# Altium PCB PCB1.PcbDoc (part 1 of 2)
Units mil, origin at the board's own origin, x right, y up, seen from the top; angles counter-clockwise.
Board outline 4130.42 x 3475.43 mil, 4 copper layers (Top Layer, Int1 (GND), Int2 (PWR), Bottom Layer), stack 53.912 mil thick; 60 components, 38 nets, 205 pads, 89 vias.
Unrouted connection lines stored in the file: 39.
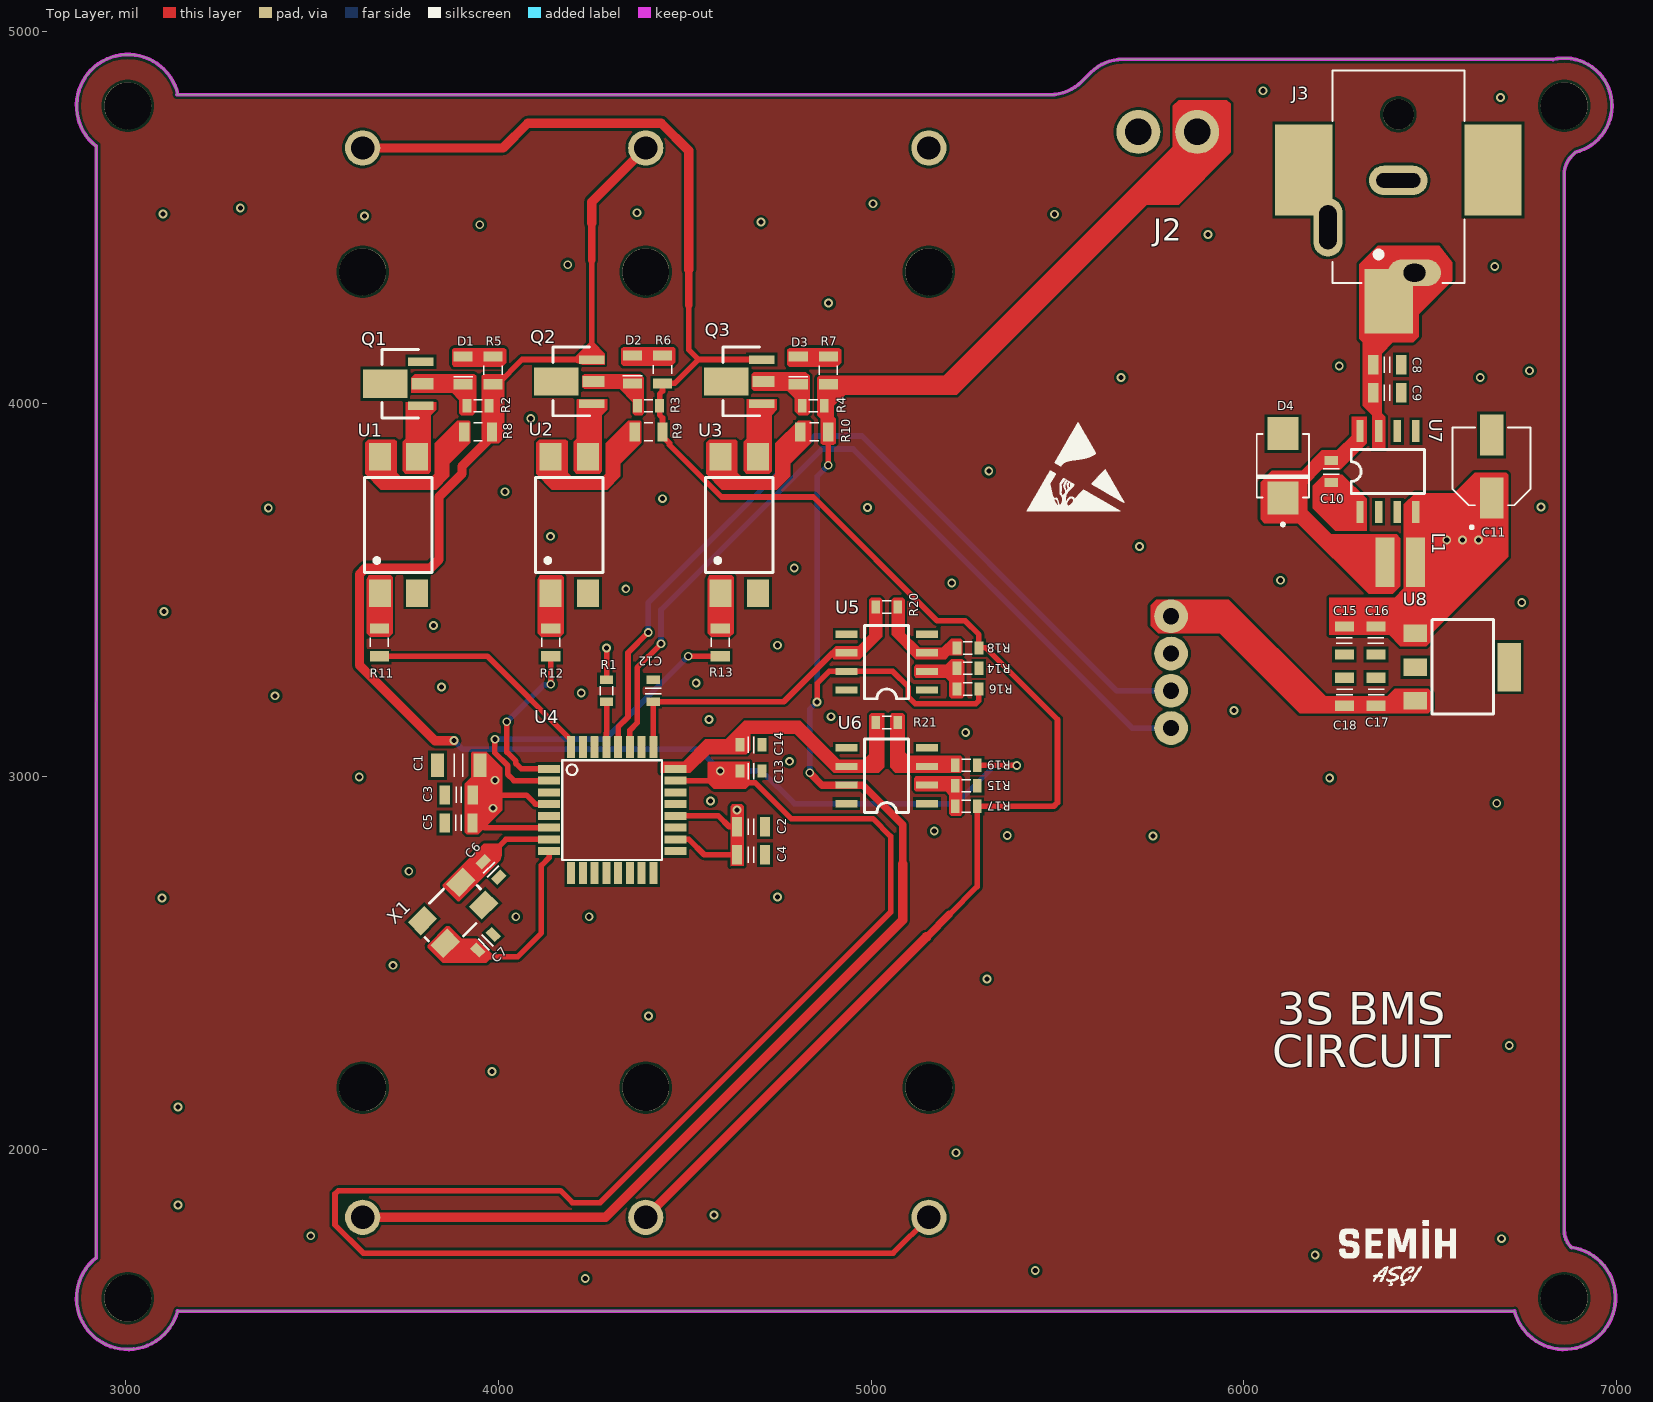
[diagram p0: Top Layer view]
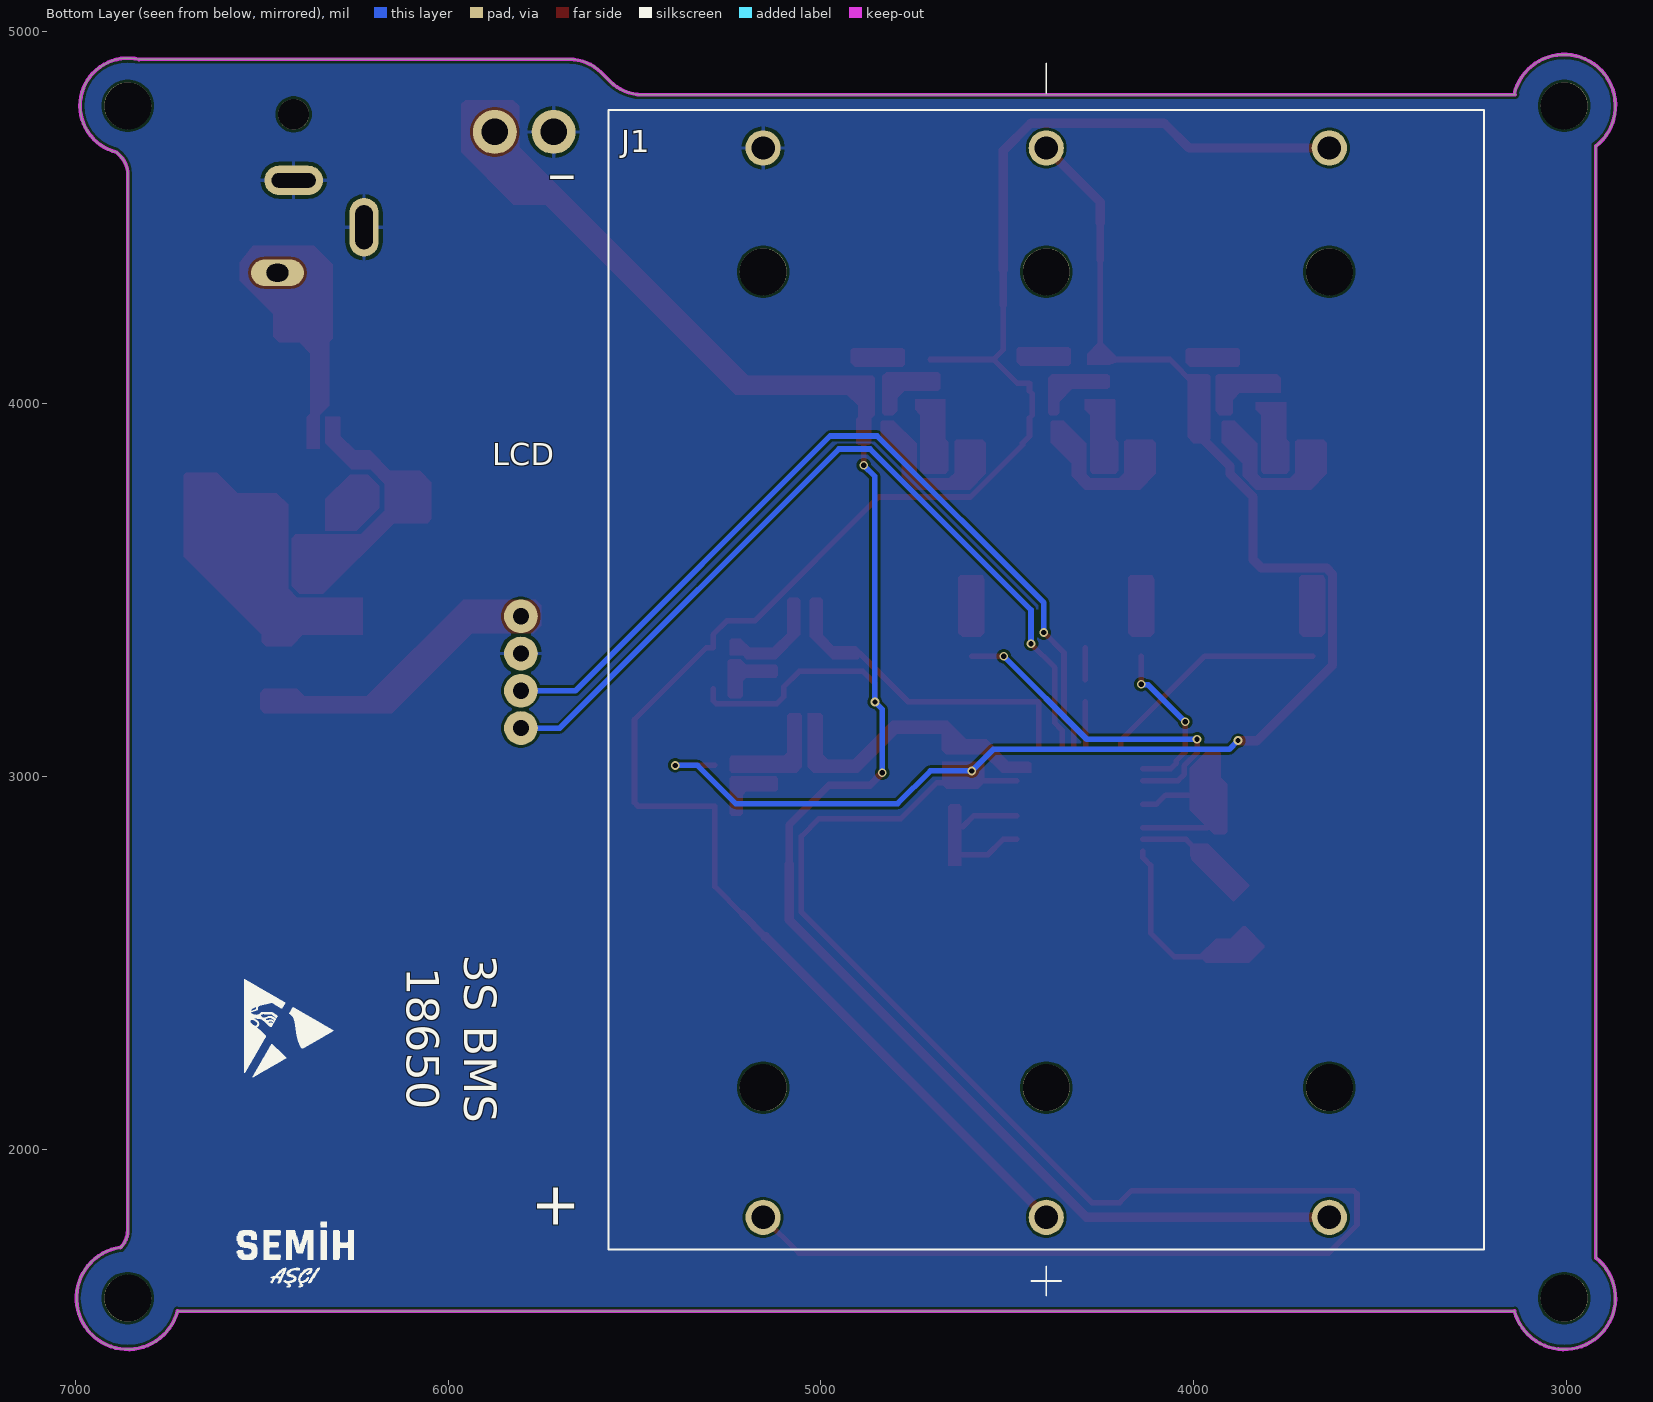
[diagram p1: Bottom Layer view, seen from below]
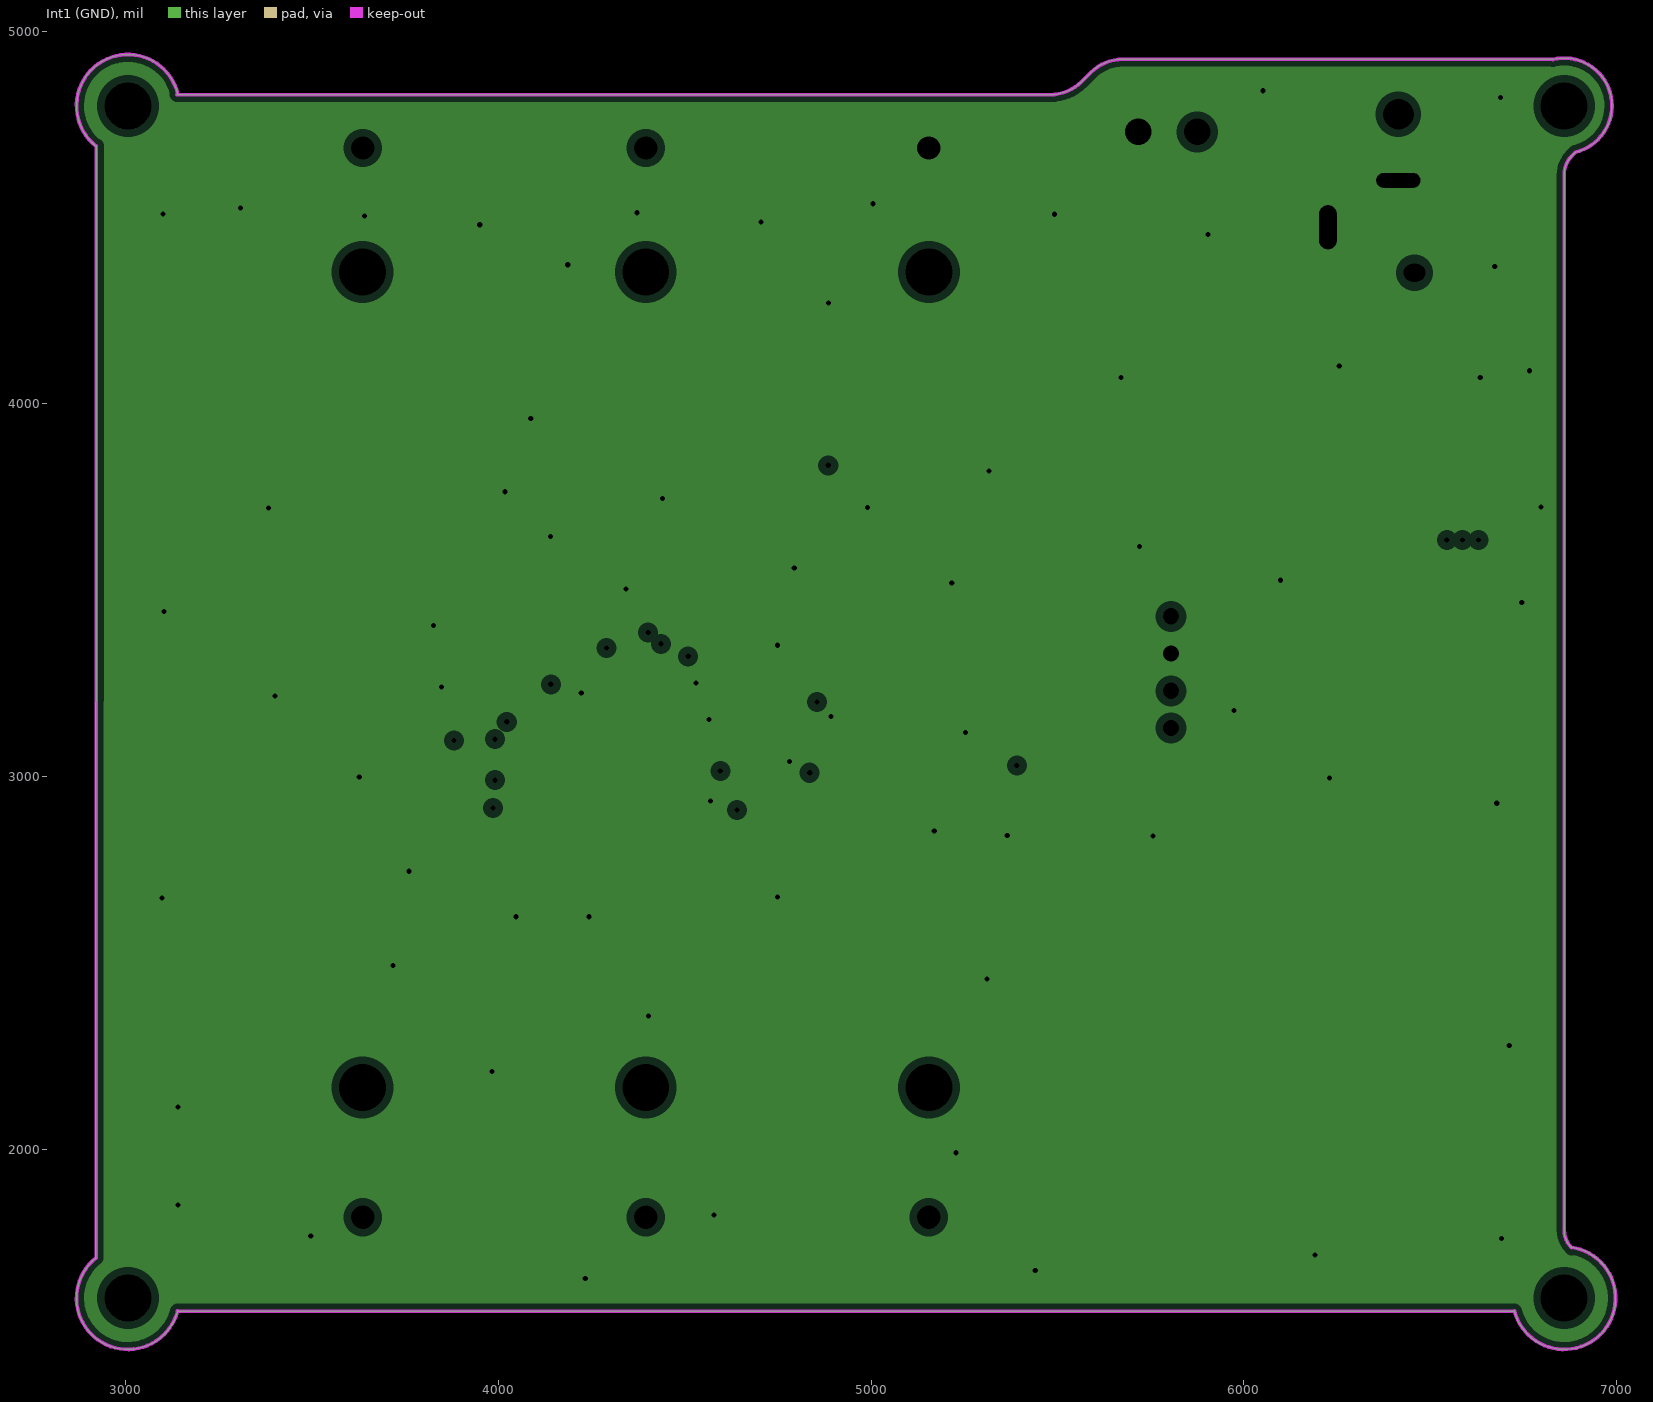
[diagram p2: Int1 (GND), clearances drawn from the general rule]
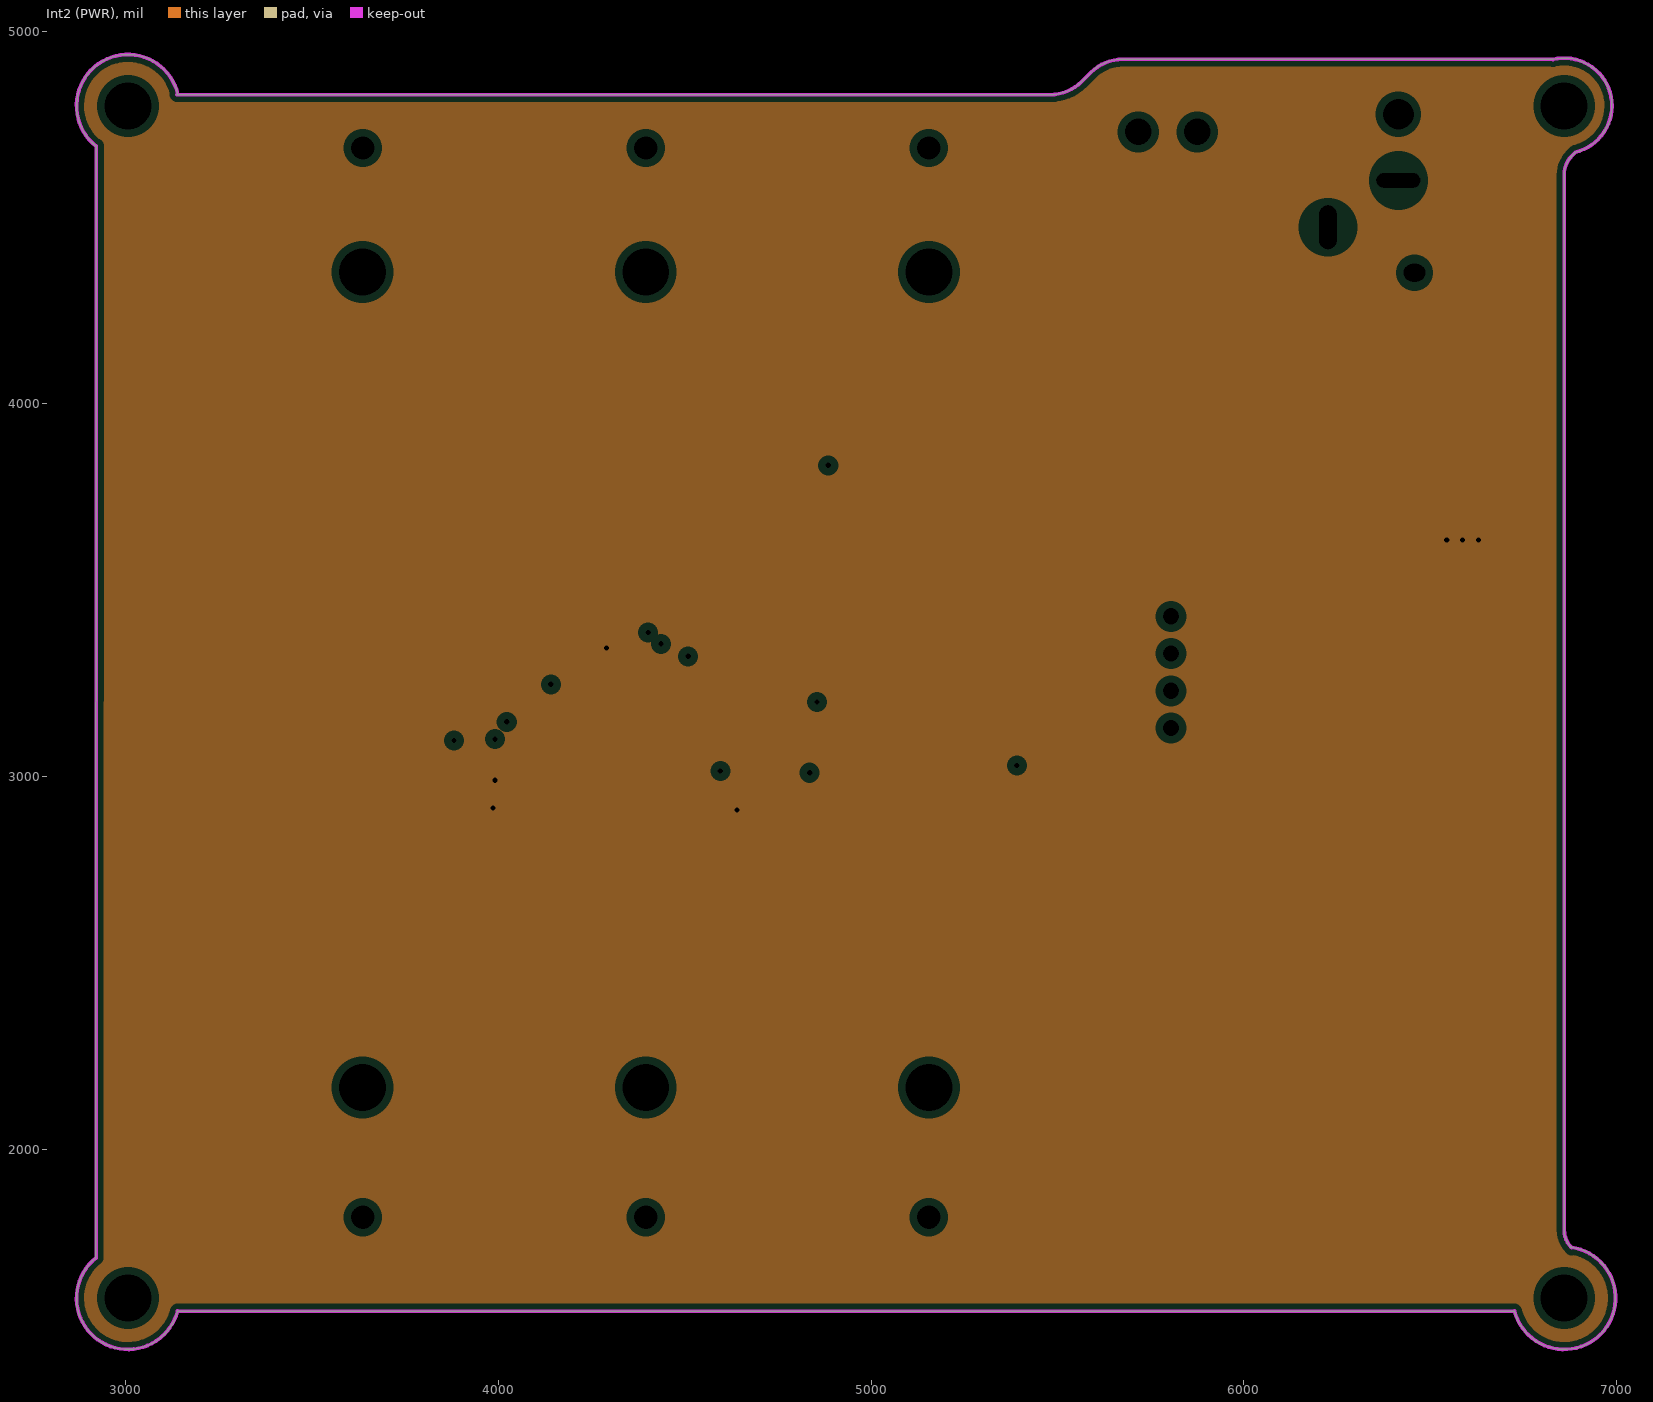
[diagram p3: Int2 (PWR), clearances drawn from the general rule]
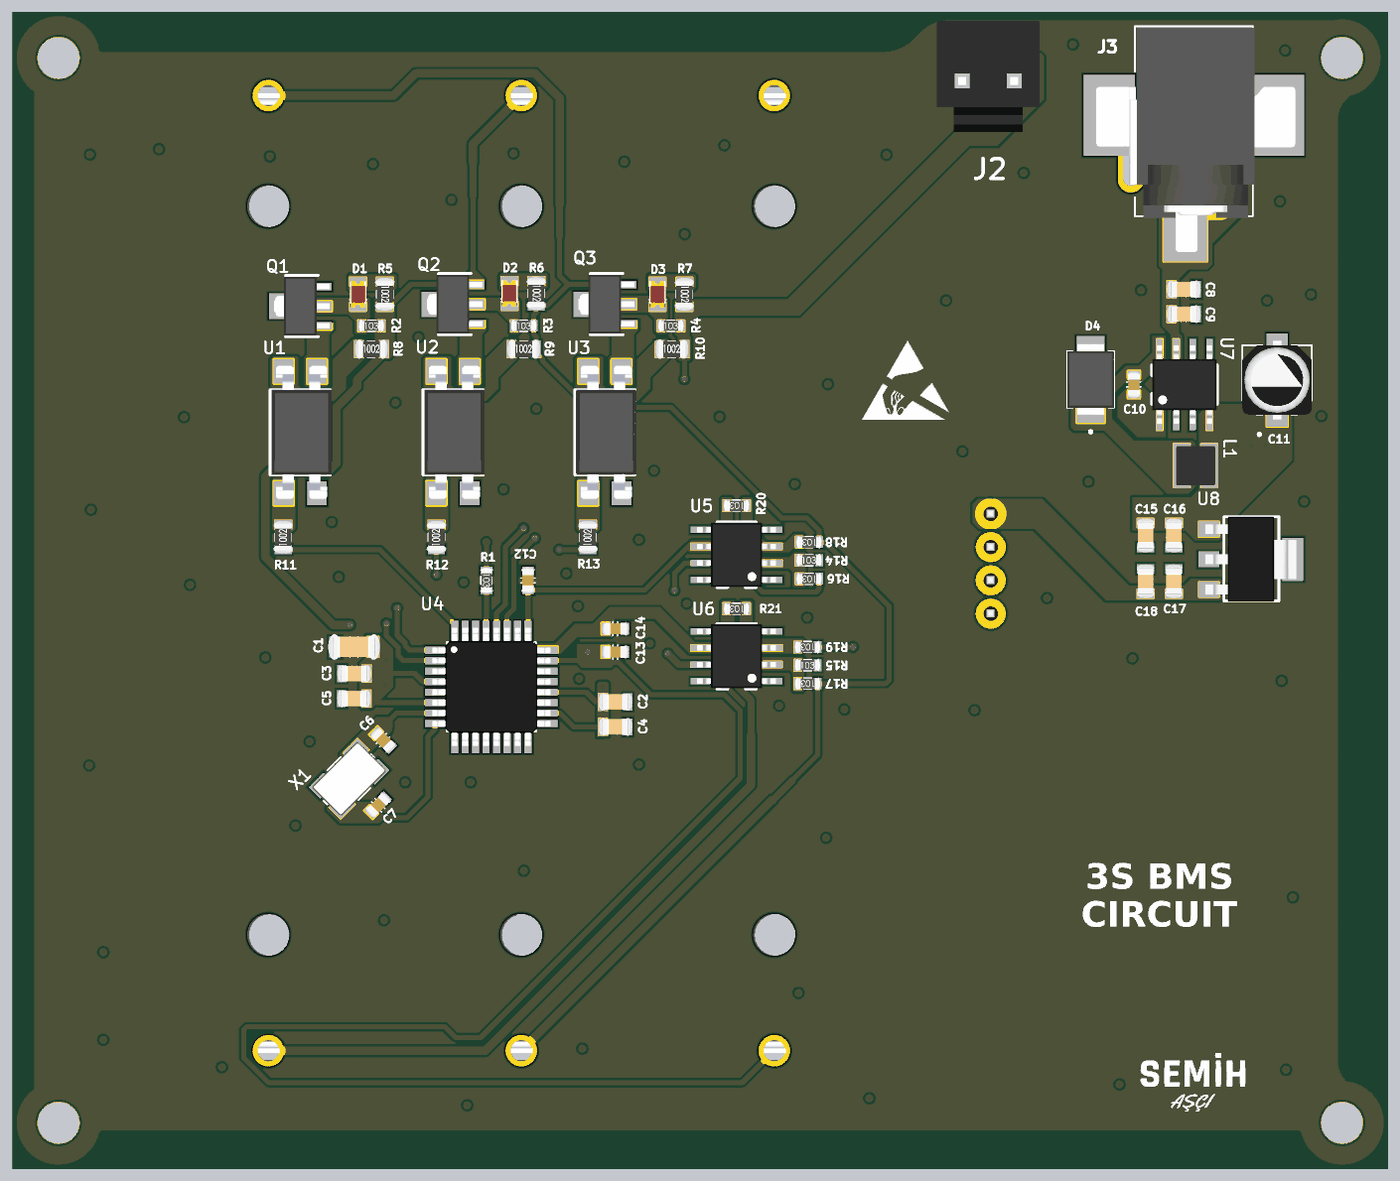
[diagram p4: 3D render of the assembled board from above, using the file's embedded part models]

## Layer stack, top to bottom
Top Solder: solder mask 1, SM-001, Dk 4
Top Layer: signal copper 1.378
Dielectric 1: prepreg 5.1, PP-017, Dk 4.3
Dielectric 2: prepreg 5.1, PP-017, Dk 4.3
Int1 (GND): plane copper 1.378, net GND
Dielectric 3: core 28, Core-039, Dk 4.8
Int2 (PWR): plane copper 1.378, net +5VDC
Dielectric 4: prepreg 5.1, PP-017, Dk 4.3
Dielectric 5: prepreg 5.1, PP-017, Dk 4.3
Bottom Layer: signal copper 1.378
Bottom Solder: solder mask 1, SM-001, Dk 4

## Board outline
2919.33,1707.93 ccw(c3005,1600) 3138.39,1565.42 3140,1565 6725,1565 6726.61,1565.42 ccw(c6860,1600) 6880.19,1736.31 6880,1735 cw(c6928.28,1783.28) 6860,1783.28 6860,1785 6860,4615 cw(c6932.42,4615) 6881.21,4666.21 6890,4675 6889.91,4675.38 ccw(c6860,4800) 6830.09,4924.62 6830,4925 5675,4925 ccw(c5675,4804.29) 5589.64,4889.64 5565.36,4865.36 cw(c5480,4950.71) 5480,4830 3136.82,4830 3139.36,4830.58 ccw(c3005,4800) 2919.62,4691.85 2920.43,4692.88

## Design rules (kind name [scope] priority, off if disabled: settings)
Clearance [All] p1: gap=7 ignorepadtopadclearanceinfootprint=FALSE except(0: Arc-Hole Track-Hole SMDPad-Hole THPad-Hole Via-Hole Fill-Hole Poly-Hole Region-Hole Text-Hole)
DiffPairsRouting [All] p1: maxlimit=10 minlimit=10 mostfreqgap=10 toplayer_minwidth=10 toplayer_maxwidth=15 toplayer_prefwidth=15 bottomlayer_minwidth=10 bottomlayer_maxwidth=15 bottomlayer_prefwidth=15 maxuncoupledlength=500
PlaneClearance [All] p1: clearance=20
PlaneConnect [All] p1: planeconnectstyle=Relief reliefexpansion=20 reliefentries=4 reliefconductorwidth=10 reliefairgap=10
PolygonConnect [All] p1: connectstyle=Relief reliefconductorwidth=10 reliefentries=4 polygonreliefangle="90 Angle" airgapwidth=10
RoutingCorners [All] p1: cornerstyle=45-Degree minsetback=80 maxsetback=80
RoutingVias [All] p1: holewidth=11.81 width=19.68 viastyle="Through Hole" minholewidth=9.84 minwidth=15.75 maxholewidth=19.68 maxwidth=39.37
SMDEntry [All] p1: side=TRUE corner=TRUE anyangle=FALSE
SMDToCorner [All] p1: distance=70000
SMDToPlane [All] p1: distance=70000
SolderMaskExpansion [All] p1: expansion=4 istentingtop=FALSE
Width [All] p1: maxlimit=75 minlimit=5 preferedwidth=15 minimp=50.000000 maximp=50.000000 favimp=50.000000
26 further rules are at their usual default settings.

## Components (designator, comment, footprint, x,y, rotation, side; value= is the part's Value field where it differs from the comment)
C1 "C1206C225K5RACAUTO" CAP_1206 3892.91,3030 r0 top
C2 "C0805C104K5RAC7800" CAP_0805 4677.4,2865 r180 top
C3 "C0805C104K5RAC7800" CAP_0805 3892.91,2950 r0 top
C4 "C0805C104K5RAC7800" CAP_0805 4677.4,2790 r180 top
C5 "C0805C104K5RAC7800" CAP_0805 3892.6,2875 r0 top
C6 "06035A220JAT2A" CAP_0603 3980,2750 r135 top
C7 "06035A220JAT2A" CAP_0603 3965,2555 r225 top
C8 "C0805C105M5RACTU" CAP_0805 6385,4105 r180 top
C9 "C0805C104K5RAC7800" CAP_0805 6385,4030 r180 top
C10 "0603B103K160CT" CAP_0603 6235,3818.43 r90 top
C11 "EEV686M035A9HAA" CAP_ELEC_EEE-HA0J101WR 6665,3832.17 r90 top
C12 "CL10B102KB8NNNC" CAP_0603 4415,3230 r270 top
C13 "CL10B102KB8NNNC" CAP_0603 4677.4,3015 r180 top
C14 "CL10B102KB8NNNC" CAP_0603 4677.4,3085 r180 top
C15 "C0805C105M5RACTU" CAP_0805 6270,3365 r90 top
C16 "C0805C104K5RAC7800" CAP_0805 6355,3365 r90 top
C17 "CL21A475KAQNNNE" CAP_0805 6355,3227.4 r270 top
C18 "C0805C105M5RACTU" CAP_0805 6270,3227.4 r270 top
D1 "LH R974-LP-1-0-20-R18" LED_RED_0805 3905,4090 r90 top
D2 "LH R974-LP-1-0-20-R18" LED_RED_0805 4359.61,4092.4 r90 top
D3 "LH R974-LP-1-0-20-R18" LED_RED_0805 4804.61,4090 r90 top
D4 "1SMB5919BT3G" SMB 6105,3833.94 r90 top
J1 "BK-18650-PC6" 18650x3 4395,3259.68 r90 bottom
J2 "B2P-VH-BK" 2x1_HEADER 5875,4730 r180 top
J3 "PJ-037AH-SMT-TR" POWER_JACK 6389.41,4275.2 r270 top
L1 "78438335470" IND_1212 6420,3575 r0 top
LCD "SSD1306" SSD1306_0.96inch 5805,3430 r270 bottom
Q1 "2SCR554P5T100" TO-243AA 3736.18,4054.06 r90 top
Q2 "2SCR554P5T100" TO-243AA 4195.12,4060 r90 top
Q3 "2SCR554P5T100" TO-243AA 4651.18,4060 r90 top
R1 "RC0603FR-0710KL" RES_0603 4290,3230 r270 top
R2 "RCP0603W50R0GEB" RES_0603 3945,3995 r0 top
R3 "RCP0603W50R0GEB" RES_0603 4402.6,3995 r0 top
R4 "RCP0603W50R0GEB" RES_0603 4844.53,3995 r0 top
R5 "RES 220 OHM 0805" RES_0805 3985,4090 r270 top
R6 "RES 220 OHM 0805" RES_0805 4440,4092.4 r270 top
R7 "RES 220 OHM 0805" RES_0805 4885,4090 r270 top
R8 "RC0805FR-071KL" RES_0805 3945,3925 r0 top
R9 "RC0805FR-071KL" RES_0805 4402.6,3925 r0 top
R10 "RC0805FR-071KL" RES_0805 4847.4,3925 r0 top
R11 "RES 220 OHM 0805" RES_0805 3680,3360 r90 top
R12 "RES 220 OHM 0805" RES_0805 4140,3360 r90 top
R13 "RES 220 OHM 0805" RES_0805 4595,3360 r90 top
R14 "RC0603FR-0710KL" RES_0603 5259.53,3290.32 r0 top
R15 "RC0603FR-0710KL" RES_0603 5255,2975 r0 top
R16 "RC0603FR-0710KL" RES_0603 5259.53,3235 r180 top
R17 "RC0603FR-0710KL" RES_0603 5255,2920 r180 top
R18 "RC0603FR-0710KL" RES_0603 5259.53,3345 r180 top
R19 "RC0603FR-0710KL" RES_0603 5255,3030 r180 top
R20 "RC0603FR-0710KL" RES_0603 5041.57,3455 r180 top
R21 "RC0603FR-0710KL" RES_0603 5041.57,3145 r180 top
U1 "BPC-817S ( C BIN )" "4-SMD, Gull Wing" 3735,3675 r90 top
U2 "BPC-817S ( C BIN )" "4-SMD, Gull Wing" 4193.94,3675 r90 top
U3 "BPC-817S ( C BIN )" "4-SMD, Gull Wing" 4650,3675 r90 top
U4 "ATMEGA88PA-AU" 32TQFP 4305,2910 r0 top
U5 "UA741CD" SOIC8 5040,3305 r90 top
U6 "UA741CD" SOIC8 5040,3000 r90 top
U7 "LM2675MX-12/NOPB" SOIC8 6385,3820 r0 top
U8 "AP7361-33E-13" SOT223 6585,3295 r270 top
X1 "ECS-160-20-30B-TR" ECS 3877.04,2632.73 r45 top

## Footprints (in the part's own frame and the unit in brackets; to place one, negate y for a bottom-side part, rotate by r counter-clockwise, add the part's x,y. Pads: shape width x height; smd on the part's side, far side on the other; paste and mask are expansions set on the pad)
2x1_HEADER [mm]
  round 3 hole 1.8 mask+0.05: 1(0,0) 2(4.01,0)
  body extent -1.95,-4.61 5.91,3.89, height 10.9
"4-SMD, Gull Wing" [mm]
  rect 1.85x1.5 smd: 1(-4.65,1.37) 2(-4.65,-1.17) 3(4.65,-1.17) 4(4.65,1.37)
  silkscreen extent -3.25,-2.2 3.25,2.4, body extent -5.08,-2.29 5.08,2.29, height 3.75
32TQFP [mm]
  rect 1.5x0.55 smd: 1(-4.3,2.8) 2(-4.3,2) 3(-4.3,1.2) 4(-4.3,0.4) 5(-4.3,-0.4) 6(-4.3,-1.2) 7(-4.3,-2) 8(-4.3,-2.8) 17(4.3,-2.8) 18(4.3,-2) 19(4.3,-1.2) 20(4.3,-0.4) 21(4.3,0.4) 22(4.3,1.2) 23(4.3,2) 24(4.3,2.8)
  rect 0.55x1.5 smd: 9(-2.8,-4.3) 10(-2,-4.3) 11(-1.2,-4.3) 12(-0.4,-4.3) 13(0.4,-4.3) 14(1.2,-4.3) 15(2,-4.3) 16(2.8,-4.3) 25(2.8,4.3) 26(2,4.3) 27(1.2,4.3) 28(0.4,4.3) 29(-0.4,4.3) 30(-1.2,4.3) 31(-2,4.3) 32(-2.8,4.3)
  silkscreen extent -3.4,-3.4 3.4,3.4, body extent -4.51,-4.51 4.51,4.51, height 1
18650x3 [mm]
  round 2.4 hole 1.6: 1+(-36.65,19.3) 1-(36.25,19.3) 2+(-36.65,0) 2-(36.25,0) 3+(-36.65,-19.3) 3-(36.25,-19.3)
  round 3.2 hole 3.2 unplated: ""(-27.805,-19.3) ""(-27.805,0) ""(-27.805,19.3) ""(27.805,-19.3) ""(27.805,0) ""(27.805,19.3)
  silkscreen extent -42,-29.84 42,29.84, body extent -38.86,-29.74 38.84,29.95, height 21.74
CAP_0603 [mm]
  rect 0.6x0.9 smd: 1(-0.75,0) 2(0.75,0)
  silkscreen extent -0.18,-0.54 0.19,0.56, body extent -1.06,-0.51 1.04,0.52, height 0.8
CAP_0805 [mm]
  rect 0.7x1.3 smd mask+0.05: 1(-0.95,0) 2(0.95,0)
  silkscreen extent -0.18,-0.54 0.19,0.56, body extent -1.3,-0.68 1.3,0.68, height 0.9
CAP_1206 [mm]
  rect 0.9x1.6 smd mask+0.05: 1(-1.45,0) 2(1.45,0)
  silkscreen extent -0.29,-0.78 0.29,0.79, body extent -1.97,-0.98 1.97,0.98, height 1.3
CAP_ELEC_EEE-HA0J101WR [mm]
  rect 2.8x1.6 smd: 1(-2.15,0) 2(2.15,0)
  silkscreen extent -4.25,-2.65 2.65,2.65, body extent -3,-2.65 3,2.65, height 5.8
ECS [mm]
  rect 1.6x1.25 smd mask+0.05: 1(-1.81,-1.09) 2(1.89,-1.09) 3(1.89,1.11) 4(-1.81,1.11)
  silkscreen extent -2.51,-1.61 2.51,1.61, body extent -2.46,-1.59 2.54,1.61, height 0.85
IND_1212 [mm]
  rect 1.3x3.4 smd mask+0.05: 1(-1.05,0) 2(1.05,0)
  body extent -1.5,-1.5 1.5,1.5, height 1.2
LED_RED_0805 [mm]
  rect 0.7x1.3 smd mask+0.05: 1(-0.95,0.01) 2(0.95,0.01)
  silkscreen extent -0.42,-0.65 -0.42,0.66, body extent -1.01,-0.62 1.01,0.64, height 1.1
POWER_JACK [mm]
  oval 1.8x3.6 hole 1.2 slot 1.5 at 90 deg: 1(-1.95,1.75)
  rect 4.4x3.3 smd: 1(0,0)
  rect 6.2x3.9 smd: 2(-8.95,7.1) 3(-8.95,-5.8)
  oval 2x4 hole 1 slot 3 at 90 deg: 2(-8.25,0.65)
  oval 4x2 hole 1.2 slot 3 at 0 deg: 3(-5.05,-4.15)
  round 2.1 hole 2.1 unplated: ""(-12.75,0.65)
  silkscreen extent -15.75,-3.85 -1.25,5.15, body extent -15.62,-6.81 1.48,8.39, height 11.1
RES_0603 [mm]
  rect 0.6x0.9 smd mask+0.05: 1(-0.75,0) 2(0.75,0)
  silkscreen extent -0.3,-0.42 0.3,0.42, body extent -0.99,-0.47 0.99,0.51, height 0.43
RES_0805 [mm]
  rect 0.7x1.3 smd mask+0.05: 1(-0.95,0) 2(0.95,0)
  silkscreen extent -0.3,-0.62 0.3,0.62, body extent -1.25,-0.75 1.25,0.75, height 0.5
SMB [mm]
  rect 2.25x2.12 smd: 1(2.185,0) 2(-2.185,0)
  silkscreen extent -4.1,-1.8 2.16,1.8, body extent -2.72,-1.78 2.72,1.78, height 2.49
SOIC8 [mm]
  rect 0.5x1.5 smd mask+0.05: 1(-1.855,-2.79) 2(-0.585,-2.79) 3(0.685,-2.79) 4(1.955,-2.79) 5(1.955,2.71) 6(0.685,2.71) 7(-0.585,2.71) 8(-1.855,2.71)
  silkscreen extent -2.45,-1.54 2.55,1.46, body extent -2.4,-3.04 2.5,2.96, height 1.75
SOT223 [mm]
  rect 1.2x1.6 smd mask+0.05: 1(-2.26,-3.17) 2(0.04,-3.17) 3(2.34,-3.17)
  rect 3.3x1.6 smd mask+0.05: 2(0.04,3.23)
  silkscreen extent -3.21,-2.03 3.22,2.17, body extent -3.21,-3.45 3.29,3.51, height 1.65
SSD1306_0.96inch [mm]
  round 2.3 hole 1.1 mask+0.05: 1(0,0) 2(2.54,0) 3(5.08,0) 4(7.62,0)
  body extent -9.56,-25.49 17.14,2.37, height 5.47
TO-243AA [mm]
  rect 0.58x1.73 smd: 1(-1.5,-1.4) 3(1.5,-1.4)
  rect 0.76x1.5 smd: 2(0,-1.515)
  rect 1.933x3.03 smd: 4(0,1.01)
  silkscreen extent -2.33,-1.25 2.35,1.25, body extent -2.25,-2.11 2.25,2.14, height 1.54

## Part data
C1: library part "CAP 2.2uF 1206", "Cap Ceramic 2.2uF %10 SMD 1206", Capacitance=2.2uF, Case Code (Metric)=3216, Case Code (Imperial)=1206, Dielectric=X7R, Dielectric Material=Ceramic, Manufacturer=KEMET, Max Operating Temperature=125°C, Min Operating Temperature=-55°C, Package Quantity=1, Ratings=AEC-Q200, Supplier Part Number 1=399-7019-1-ND, Tolerance=10%, Voltage Rating=50V, Case/Package=1206, Category="Ceramic Capacitors", ComponentLink1Description=https://datasheet.ciiva.com/7729/1691965-7729877.pdf?src-supplier=Element14, ComponentLink1URL=https://datasheet.ciiva.com/7729/1691965-7729877.pdf?src-supplier=Element14, ComponentLink2Description=https://datasheet.ciiva.com/22699/1691965-22699768.pdf?src-supplier=Element14, ComponentLink2URL=https://datasheet.ciiva.com/22699/1691965-22699768.pdf?src-supplier=Element14, Construction=Flat, Contact Plating=Tin,Matte, Depth=1.6mm, Designed by="Semih AŞÇI", Height=1.6mm, Length=3.2mm, Manufacturer Part Number=C1206C225K5RACAUTO, Mount="Surface Mount", Packaging="Tape and Reel", Pricing 1="1=0,34000, 10=0,23100, 50=0,15400, 100=0,13090, 500=0,09240, 1000=0,08085 (USD)", Radiation Hardening=No, REACH SVHC="No SVHC", RoHS=Yes, RoHS Compliant=Yes, Series=C, Stock 1=10000, Supplier 1=Digi-Key, Termination=SMD/SMT, Thickness=0.071inch, Voltage Rating (DC)=50V, Width=0.063inch
C2 C3 C4 C5 C9 C16: library part "CAP 100nF 0805", "Cap Ceramic 100nF %10 SMD 0805", Capacitance=100nF, Case Code (Metric)=2012, Case Code (Imperial)=0805, Dielectric=X7R, Dielectric Material=Ceramic, Manufacturer=KEMET, Manufacturer Part Number=C0805C104K5RACTU, Max Operating Temperature=125°C, Min Operating Temperature=-55°C, Package Quantity=4000, Supplier Part Number 1=399-C0805C104K5RAC7800CT-ND, Tolerance=10%, Voltage=500V, Voltage Rating=50V, Case/Package=0805, Category="Ceramic Capacitors", ComponentLink1Description=https://datasheet.ciiva.com/32431/slceramic-chip-condensers-e-32431755.pdf?src-supplier=Distrelec, ComponentLink1URL=https://datasheet.ciiva.com/32431/slceramic-chip-condensers-e-32431755.pdf?src-supplier=Distrelec, ComponentLink2Description=https://datasheet.ciiva.com/28682/1851736-28682232.pdf?src-supplier=Element14, ComponentLink2URL=https://datasheet.ciiva.com/28682/1851736-28682232.pdf?src-supplier=Element14, ComponentLink3Description=https://datasheet.ciiva.com/18410/70095383-18410815.pdf?src-supplier=Allied+Electronics, ComponentLink3URL=https://datasheet.ciiva.com/18410/70095383-18410815.pdf?src-supplier=Allied+Electronics, ComponentLink4Description=https://datasheet.ciiva.com/14589/70095383-14589048.pdf?src-supplier=Allied+Electronics, ComponentLink4URL=https://datasheet.ciiva.com/14589/70095383-14589048.pdf?src-supplier=Allied+Electronics, Construction=Flat, Contact Plating=Tin,Matte, Depth=1.25mm, Designed by="Semih AŞÇI", Height=0.9mm, Lead Pitch=0.75mm, Length=2mm, Mount="Surface Mount,PCB", Number of Pins=2, Packaging="Tape and Reel", Pricing 1="1=0,15000, 10=0,10500, 50=0,05960, 100=0,04940, 500=0,03466, 1000=0,02869 (USD)", Radiation Hardening=No, REACH SVHC="No SVHC", RoHS=Yes, RoHS Compliant=Yes, Series=C0805C, Stock 1=36, Supplier 1=Digi-Key, Termination=SMD/SMT, Thickness=0.035inch, Voltage Rating (DC)=50V, Width=1.2mm
C6 C7: library part "CAP 22pF 0603", "Cap Ceramic 22pF ±%5 SMD 0603", Capacitance=22pF, Case Code (Metric)=1608, Case Code (Imperial)=0603, Dielectric=C0G, Dielectric Material=Ceramic, Manufacturer="Kyocera AVX", Max Operating Temperature=125°C, Min Operating Temperature=-55°C, Package Quantity=1, Supplier Part Number 1=478-1167-2-ND, Temperature Coefficient=30ppm/°C, Tolerance=5%, Voltage=50V, Insulation Resistance=100GR, Case/Package=0603, Category="Ceramic Capacitors", ComponentLink1Description=https://datasheet.ciiva.com/11788/0900766b802d4697-11788031.pdf?src-supplier=RSComponents, ComponentLink1URL=https://datasheet.ciiva.com/11788/0900766b802d4697-11788031.pdf?src-supplier=RSComponents, ComponentLink2Description=https://datasheet.ciiva.com/16351/ccog-16351125.pdf?src-supplier=Future+Electronics, ComponentLink2URL=https://datasheet.ciiva.com/16351/ccog-16351125.pdf?src-supplier=Future+Electronics, ComponentLink3Description=https://datasheet.ciiva.com/7855/759117-7855064.pdf?src-supplier=Element14, ComponentLink3URL=https://datasheet.ciiva.com/7855/759117-7855064.pdf?src-supplier=Element14, ComponentLink4Description=https://datasheet.ciiva.com/150/ccog-150366.pdf?src-supplier=Digi-Key, ComponentLink4URL=https://datasheet.ciiva.com/150/ccog-150366.pdf?src-supplier=Digi-Key, ComponentLink5Description=https://datasheet.ciiva.com/150/ccog-150367.pdf?src-supplier=Digi-Key, ComponentLink5URL=https://datasheet.ciiva.com/150/ccog-150367.pdf?src-supplier=Digi-Key, ComponentLink6Description=https://datasheet.ciiva.com/1124/759117-1124728.pdf?src-supplier=Element14, ComponentLink6URL=https://datasheet.ciiva.com/1124/759117-1124728.pdf?src-supplier=Element14, Contact Plating=Tin,Matte, Depth=0.81mm, Designed by="Semih AŞÇI", Height=0.63mm, Lead Free="Lead Free", Length=1.6mm, Manufacturer Part Number=06035A220JAT2A, Mount="Surface Mount,PCB", Number of Pins=2, Packaging="Tape and Reel", Pricing 1="4000=0,01164, 8000=0,01063 (USD)", Radiation Hardening=No, REACH SVHC="No SVHC", RoHS=Yes, RoHS Compliant=Yes, Stock 1=1291575, Supplier 1=Digi-Key, Termination=SMD/SMT, Thickness=0.035inch, Voltage Rating=50V, Voltage Rating (DC)=50V, Width=0.81mm
C8 C15 C18: library part "CAP 1uF 0805", "Cap Ceramic 1uF %20 SMD 0805", Capacitance=1uF, Case Code (Metric)=2012, Case Code (Imperial)=0805, Dielectric=X7R, Dielectric Material=Ceramic, Manufacturer=KEMET, Max Operating Temperature=125°C, Min Operating Temperature=-55°C, Package Quantity=1, Supplier Part Number 1=399-7410-1-ND, Tolerance=20%, Voltage Rating=50V, Case/Package=0805, Category="Ceramic Capacitors", ComponentLink1Description=https://datasheet.ciiva.com/5408/kem-c1002-x7r-smd-357932-5408805.pdf?src-supplier=Mouser, ComponentLink1URL=https://datasheet.ciiva.com/5408/kem-c1002-x7r-smd-357932-5408805.pdf?src-supplier=Mouser, Designed by="Semih AŞÇI", Dissipation Factor=3%, Length=0.079inch, Manufacturer Part Number=C0805C105M5RACTU, Mount="Surface Mount", Packaging="Tape and Reel", Pricing 1="1=0,35000, 10=0,24100, 50=0,16860, 100=0,14450, 500=0,10840, 1000=0,09154 (USD)", RoHS=Yes, RoHS Compliant=Yes, Series=C, Stock 1=8463, Supplier 1=Digi-Key, Termination=SMD/SMT, Thickness=0.055inch, Voltage Rating (DC)=50V, Width=0.049inch
C10: library part "CAP 10nF 0603", "Cap Ceramic 10nF %10 SMD 0603", Capacitance=10nF, Case Code (Metric)=1608, Case Code (Imperial)=0603, Dielectric=X7R, Manufacturer="Walsin Technologies", Max Operating Temperature=125°C, Min Operating Temperature=-55°C, Supplier Part Number 1=1292-1384-1-ND, Tolerance=10%, Voltage Rating=16V, Case/Package=0603, Category="Ceramic Capacitors", ComponentLink1Description=http://www.farnell.com/datasheets/1958513.pdf?src-supplier=Farnell, ComponentLink1URL=http://www.farnell.com/datasheets/1958513.pdf?src-supplier=Farnell, ComponentLink2Description=http://components.arrow.com/part/dataview/0323_00656382?src-supplier=Arrow+Europe, ComponentLink2URL=http://components.arrow.com/part/dataview/0323_00656382?src-supplier=Arrow+Europe, ComponentLink3Description=http://www.farnell.com/datasheets/1958513.pdf?src-supplier=Element14, ComponentLink3URL=http://www.farnell.com/datasheets/1958513.pdf?src-supplier=Element14, ComponentLink4Description=http://www.passivecomponent.com/wp-content/uploads/2018/10/MLCC.pdf?src-supplier=Digi-Key, ComponentLink4URL=http://www.passivecomponent.com/wp-content/uploads/2018/10/MLCC.pdf?src-supplier=Digi-Key, Depth=0.8mm, Designed by="Semih AŞÇI", Length=1.6mm, Manufacturer Part Number=0603B103K160CT, Packaging="Tape and Reel", Pricing 1="1=0,10000, 10=0,03600, 50=0,01980, 100=0,01620, 500=0,01156, 1000=0,00908 (USD)", REACH SVHC=Unknown, RoHS=Yes, RoHS Compliant=Yes, Stock 1=4117, Supplier 1=Digi-Key, Voltage Rating (DC)=16V
C11: library part "CAP 68uF Polar SMD", "Cap Aluminum Lytic 68uF 35V 20% (6.3 X 7.7mm) SMD 280mA 2000h 105C T/R", Capacitance=68uF, Case/Package=Radial, Manufacturer=KEMET, Max Operating Temperature=105°C, Min Operating Temperature=-40°C, Package Quantity=1, Ripple Current=196mA, Supplier Part Number 1=399-6722-1-ND, Tolerance=20%, Voltage Rating=35V, Category="Aluminum Electrolytic Capacitors", ComponentLink1Description=https://datasheet.ciiva.com/5365/kem-a4002-eev-535332-5365784.pdf?src-supplier=Mouser, ComponentLink1URL=https://datasheet.ciiva.com/5365/kem-a4002-eev-535332-5365784.pdf?src-supplier=Mouser, Designed by="Semih AŞÇI", Height - Seated (Max)=0.315inch, Length=7.7mm, Life (Hours)=2000Hour, Manufacturer Part Number=EEV686M035A9HAA, Mount="Surface Mount", Packaging="Tape and Reel", Pricing 1="1=0,61000, 10=0,42900, 50=0,32440, 100=0,28260, 500=0,20930 (USD)", RoHS=Yes, RoHS Compliant=Yes, Series=EEV, Stock 1=250, Supplier 1=Digi-Key, Termination=SMD/SMT, Voltage Rating (DC)=35V, Impedance=340mR
C12 C13 C14: library part "CAP 1nF 0603", "Cap Ceramic 1nF %10 SMD 0603", Capacitance=1nF, Case Code (Metric)=1608, Case Code (Imperial)=0603, Dielectric=X7R, Manufacturer=Samsung, Max Operating Temperature=125°C, Min Operating Temperature=-55°C, Package Quantity=1, Supplier Part Number 1=1276-1018-1-ND, Tolerance=10%, Voltage=50V, Case/Package=0603, Category="Ceramic Capacitors", ComponentLink1Description=https://datasheet.ciiva.com/25805/cl10b102kb8nnnc-25805137.pdf?src-supplier=Digi-Key, ComponentLink1URL=https://datasheet.ciiva.com/25805/cl10b102kb8nnnc-25805137.pdf?src-supplier=Digi-Key, ComponentLink2Description=https://datasheet.ciiva.com/15216/getdatasheetpartid-359690-15216231.pdf?src-supplier=Verical, ComponentLink2URL=https://datasheet.ciiva.com/15216/getdatasheetpartid-359690-15216231.pdf?src-supplier=Verical, ComponentLink3Description=https://datasheet.ciiva.com/29198/458300-da-01-en-vs-kondensator-0603-29198498.pdf?src-supplier=Conrad, ComponentLink3URL=https://datasheet.ciiva.com/29198/458300-da-01-en-vs-kondensator-0603-29198498.pdf?src-supplier=Conrad, ComponentLink4Description=https://datasheet.ciiva.com/26310/mlcc-catalogdownload2013-eng-26310326.pdf?src-supplier=Distrelec, ComponentLink4URL=https://datasheet.ciiva.com/26310/mlcc-catalogdownload2013-eng-26310326.pdf?src-supplier=Distrelec, ComponentLink5Description=https://datasheet.ciiva.com/16199/cl05b104kq5nnnc-16199064.pdf?src-supplier=Future+Electronics, ComponentLink5URL=https://datasheet.ciiva.com/16199/cl05b104kq5nnnc-16199064.pdf?src-supplier=Future+Electronics, Construction=Flat, Contact Plating=Tin, Depth=0.8mm, Designed by="Semih AŞÇI", Height=0.8mm, Lead Free="Lead Free", Length=1.6mm, Manufacturer Part Number=CL10B102KB8NNNC, Material=Ceramic, Mount="Surface Mount", Packaging="Tape and Reel", Pricing 1="1=0,10000, 10=0,03100, 50=0,01700, 100=0,01400, 500=0,00998, 1000=0,00783 (USD)", Radiation Hardening=No, RoHS=Yes, RoHS Compliant=Yes, Series=CL, Stock 1=368, Supplier 1=Digi-Key, Thickness=0.035inch, Voltage Rating=50V, Voltage Rating (DC)=50V, Width=0.031inch
C17: library part "CAP 4,7uF 0805", "Cap Ceramic 4.7uF 25V X5R 10% SMD 0805 85C Embossed T/R", Capacitance=4.7uF, Case Code (Metric)=2012, Case Code (Imperial)=0805, Dielectric=X5R, Manufacturer=Samsung, Max Operating Temperature=85°C, Min Operating Temperature=-55°C, Package Quantity=1, Supplier Part Number 1=1276-1244-1-ND, Tolerance=10%, Voltage Rating=25V, Case/Package=0805, Category="Ceramic Capacitors", ComponentLink1Description=https://datasheet.ciiva.com/25798/cl21a475kaqnnne-25798882.pdf?src-supplier=Digi-Key, ComponentLink1URL=https://datasheet.ciiva.com/25798/cl21a475kaqnnne-25798882.pdf?src-supplier=Digi-Key, Construction=Flat, Depth=1.25mm, Designed by="Semih AŞÇI", Height=1.25mm, Lead Free="Lead Free", Length=2mm, Manufacturer Part Number=CL21A475KAQNNNE, Mount="Surface Mount", Packaging="Tape and Reel", Pricing 1="1=0,11000, 10=0,08000, 50=0,04520, 100=0,03740, 500=0,02624, 1000=0,02172 (USD)", Radiation Hardening=No, RoHS=Yes, RoHS Compliant=Yes, Series=CL, Stock 1=4084, Supplier 1=Digi-Key, Thickness=0.055inch, Voltage Rating (DC)=25V, Width=0.049inch
D1 D2 D3: library part "LED RED", "Chipled 0805 Hyp Red 645NM", Case/Package=0805, Forward Voltage=1.8V, Manufacturer="Osram Opto", Manufacturer Part Number=LHR974-LP-1-0-20-R18, Supplier Part Number 1=475-LHR974-LP-1-0-20-R18TR-ND, Category=LEDs, ComponentLink1Description=https://www.verical.com/server-webapp/html/getDatasheet?partID=752067&src-supplier=Verical, ComponentLink1URL=https://www.verical.com/server-webapp/html/getDatasheet?partID=752067&src-supplier=Verical, Designed by="Semih AŞÇI", Lead Free="Lead Free", Lens Style=Diffused, Luminous Intensity=15mcd, RoHS=Yes, RoHS Compliant=Yes, Supplier 1=Digi-Key, Viewing Angle=160°, Wavelength=660nm
D4: "Diode, Zener, Vr 5.6V, If 200mA, Pkg SMB, Vf 1.5V, Tj +150degc, Pd 3W, Ir 66.9mA", Breakdown Voltage=5.88V, Case/Package=SMB, Forward Voltage=1.5V, Manufacturer="ON Semiconductor", Max Operating Temperature=150°C, Max Power Dissipation=3W, Max Reverse Current=5uA, Min Operating Temperature=-65°C, Package Quantity=1, Power Dissipation=550mW, Supplier Part Number 1=45J2449, Test Current=66.9mA, Tolerance=5%, Voltage Rating (DC)=5.6V, Zener Current=267mA, Category="Zener Diodes", ComponentLink1Description=https://datasheet.ciiva.com/27747/1308331-27747654.pdf?src-supplier=Jameco, ComponentLink1URL=https://datasheet.ciiva.com/27747/1308331-27747654.pdf?src-supplier=Jameco, ComponentLink2Description=https://datasheet.ciiva.com/1182/1smb5913bt3-d-1182657.pdf?src-supplier=Element14, ComponentLink2URL=https://datasheet.ciiva.com/1182/1smb5913bt3-d-1182657.pdf?src-supplier=Element14, ComponentLink3Description=https://datasheet.ciiva.com/1182/1smb5913bt3-d-1182658.pdf?src-supplier=Element14, ComponentLink3URL=https://datasheet.ciiva.com/1182/1smb5913bt3-d-1182658.pdf?src-supplier=Element14, ComponentLink4Description=https://datasheet.ciiva.com/895/1smb5913bt3-d-895203.pdf?src-supplier=Digi-Key, ComponentLink4URL=https://datasheet.ciiva.com/895/1smb5913bt3-d-895203.pdf?src-supplier=Digi-Key, ComponentLink5Description=https://datasheet.ciiva.com/895/1smb5913bt3-d-895204.pdf?src-supplier=Digi-Key, ComponentLink5URL=https://datasheet.ciiva.com/895/1smb5913bt3-d-895204.pdf?src-supplier=Digi-Key, ComponentLink6Description=https://datasheet.ciiva.com/895/1smb5913bt3-d-895205.pdf?src-supplier=Digi-Key, ComponentLink6URL=https://datasheet.ciiva.com/895/1smb5913bt3-d-895205.pdf?src-supplier=Digi-Key, ComponentLink7Description=https://datasheet.ciiva.com/15198/getdatasheetpartid-311040-15198695.pdf?src-supplier=Verical, ComponentLink7URL=https://datasheet.ciiva.com/15198/getdatasheetpartid-311040-15198695.pdf?src-supplier=Verical, ComponentLink8Description=https://datasheet.ciiva.com/16311/1smb5913bt3-d-16311847.pdf?src-supplier=Future+Electronics, ComponentLink8URL=https://datasheet.ciiva.com/16311/1smb5913bt3-d-16311847.pdf?src-supplier=Future+Electronics, ComponentLink9Description=https://datasheet.ciiva.com/16472/1smb5913bt3-d-16472779.pdf?src-supplier=Avnet+Asia, ComponentLink9URL=https://datasheet.ciiva.com/16472/1smb5913bt3-d-16472779.pdf?src-supplier=Avnet+Asia, Contact Plating=Tin,Matte, Designed by="Semih AŞÇI", Element Configuration=Single, ESD Protection=Yes, Halogen Free="Halogen Free", Height=2.13mm, Lead Free="Lead Free", Length=4.32mm, Manufacturer Part Number=1SMB5919BT3G, Material=Plastic, Max Reverse Leakage Current=5uA, Number of Pins=2, Packaging="Tape and Reel", Power Rating=3W, Pricing 1="1=0,53600, 10=0,43500, 100=0,29600, 500=0,22100 (USD)", Radiation Hardening=No, REACH SVHC="No SVHC", RoHS=Yes, Stock 1=5000, Supplier 1=Avnet, Voltage Tolerance=5%, Width=3.56mm, Working Voltage=5.6V, Zener Voltage=5.6V, Impedance=2R
J1: "Batt Holder 18650 3 Cell Pc Pin", Manufacturer="Memory Protection Devices", Package Quantity=100, Supplier Part Number 1=BK-18650-PC6-ND, Category="Power Connectors", ComponentLink1Description=https://datasheet.ciiva.com/3/bk-18650-pc6-datasheet-3897.pdf?src-supplier=Digi-Key, ComponentLink1URL=https://datasheet.ciiva.com/3/bk-18650-pc6-datasheet-3897.pdf?src-supplier=Digi-Key, Designed by="Semih AŞÇI", Manufacturer Part Number=BK-18650-PC6, Mount="Through Hole,PCB", Number of Cells=3, Pricing 1="1=7,06000, 10=5,94000, 50=5,21500, 100=4,91100, 250=4,51340, 500=4,23278, 1000=3,95216, 2500=3,57799 (USD)", RoHS=Yes, Stock 1=140, Supplier 1=Digi-Key, Termination="PC Pin"
J2: library part "2x1 Header", Designed by="Semih AŞÇI"
J3: "2.0 x 6.3 mm, 5.0 A, Horizontal, Surface Mount (SMT), Dc Power Jack Connector", Case/Package=SMD/SMT, Color=Black, Current Rating=5A, Flammability Rating="UL94 V-0", Manufacturer=CUI, Max Operating Temperature=85°C, Min Operating Temperature=-25°C, Package Quantity=200, Supplier Part Number 1=CP-037AHPJCT-ND, Voltage Rating=24V, Insulation Resistance=100MR, Category=Connectors, ComponentLink1Description=http://www.mouser.com/ds/2/670/pj-037ah-smt-516065.pdf?src-supplier=Mouser, ComponentLink1URL=http://www.mouser.com/ds/2/670/pj-037ah-smt-516065.pdf?src-supplier=Mouser, ComponentLink2Description=https://www.cui.com/product/resource/digikeypdf/pj-037ah-smt-tr.pdf?src-supplier=Digi-Key, ComponentLink2URL=https://www.cui.com/product/resource/digikeypdf/pj-037ah-smt-tr.pdf?src-supplier=Digi-Key, ComponentLink3Description=http://www.cui.com/product/resource/digikeypdf/pj-037ah-smt.pdf?src-supplier=Digi-Key, ComponentLink3URL=http://www.cui.com/product/resource/digikeypdf/pj-037ah-smt.pdf?src-supplier=Digi-Key, Connector Type=Jack, Contact Gender=Male, Contact Material=Copper, Contact Plating=Nickel, Designed by="Semih AŞÇI", Gender=Male, Housing Color=Black, Housing Material=Thermoplastic, Manufacturer Part Number=PJ-037AH-SMT-TR, Mount="Surface Mount,Through Hole", Number of Conductors=2, Orientation=Horizontal, Packaging="Tape and Reel", RoHS=Yes, Shielding=Unshielded, Supplier 1=Digi-Key, Termination=Solder
L1: library part "IND 47uH", "Fixed Ind 47UH 390MA 2.3 Ohm SMD", Case Code (Metric)=3030, Case Code (Imperial)=1212, Current Rating=390mA, DC Resistance (DCR)=2.3R, Manufacturer="Wurth Electronics", Max Operating Temperature=125°C, Min Operating Temperature=-40°C, Ratings=AEC-Q200, Resistor Type=Wirewound, Saturation Current=1.18A, Self Resonant Frequency=8MHz, Supplier Part Number 1=732-6947-1-ND, Test Frequency=100kHz, Tolerance=30%, Inductance=47uH, Case/Package=1212, Category="Fixed Inductors", ComponentLink1Description=https://media.digikey.com/pdf/Data%20Sheets/Wurth%20Electronics%20PDFs/Q+_Products_Flyer.pdf?src-supplier=Digi-Key, ComponentLink1URL=https://media.digikey.com/pdf/Data%20Sheets/Wurth%20Electronics%20PDFs/Q+_Products_Flyer.pdf?src-supplier=Digi-Key, Core Material=Ferrite, Designed by="Semih AŞÇI", Height - Seated (Max)=0.059inch, Length=0.118inch, Manufacturer Part Number=78438335470, Mount="Surface Mount", Packaging="Tape and Reel", Pricing 1="1=2,05000, 50=1,91300, 250=1,75000, 500=1,62300 (USD)", RoHS=Yes, RoHS Compliant=No, Shielding=Shielded, Stock 1=1082, Supplier 1=Digi-Key, Width=0.118inch
LCD: library part "0.96 inch I2C OLED", "0.96 inch I2C OLED screen 128x64", Designed by="Semih AŞÇI"
Q1 Q2 Q3: "Transistor Gp Bjt NPN 80V 1.5A 3-PIN SOT-89 T/r", Collector Emitter Breakdown Voltage=80V, Collector Emitter Voltage (VCEO)=300mV, Manufacturer=Rohm, Max Collector Current=1.5A, Max Power Dissipation=500mW, Supplier Part Number 1=2SCR554P5T100CT-ND, Transition Frequency=300MHz, Category=BJTs, ComponentLink1Description=http://rohmfs.rohm.com/en/products/databook/datasheet/discrete/transistor/bipolar/2scr554p5t100-e.pdf?src-supplier=Digi-Key, ComponentLink1URL=http://rohmfs.rohm.com/en/products/databook/datasheet/discrete/transistor/bipolar/2scr554p5t100-e.pdf?src-supplier=Digi-Key, Designed by="Semih AŞÇI", Manufacturer Part Number=2SCR554P5T100, Max Breakdown Voltage=80V, Mount="Surface Mount", Packaging="Cut Tape", Pricing 1="1=0,45000, 10=0,38500, 100=0,28730, 500=0,22574 (USD)", RoHS=Yes, RoHS Compliant=Yes, Stock 1=461, Supplier 1=Digi-Key
R1 R14 R15 R16 R17 R18 R19 R20 R21: library part "RES 10k OHM 0603", "Res General Purpose Thick Film 0603 10K Ohm 1% 1/10W ±100ppm/°C Molded SMD Paper T/R", Case Code (Metric)=1608, Case Code (Imperial)=0603, Manufacturer=Yageo, Max Operating Temperature=155°C, Max Power Dissipation=100mW, Min Operating Temperature=-55°C, Resistance=10k, Resistance Tolerance=1%, Resistor Type="Thick Film", Supplier Part Number 1=311-10.0KHRTR-ND, Temperature Coefficient=100ppm/°C, Voltage Rating=75V, Voltage Rating (DC)=50V, Case/Package=0603, Category="Chip SMD Resistors", ComponentLink1Description=https://datasheet.ciiva.com/7660/38590-7660789.pdf?src-supplier=Element14, ComponentLink1URL=https://datasheet.ciiva.com/7660/38590-7660789.pdf?src-supplier=Element14, ComponentLink2Description=https://datasheet.ciiva.com/7983/443971-7983596.pdf?src-supplier=Element14, ComponentLink2URL=https://datasheet.ciiva.com/7983/443971-7983596.pdf?src-supplier=Element14, ComponentLink3Description=https://datasheet.ciiva.com/22747/443971-22747519.pdf?src-supplier=Element14, ComponentLink3URL=https://datasheet.ciiva.com/22747/443971-22747519.pdf?src-supplier=Element14, ComponentLink4Description=https://datasheet.ciiva.com/46440/1868787-46440891.pdf?src-supplier=Element14, ComponentLink4URL=https://datasheet.ciiva.com/46440/1868787-46440891.pdf?src-supplier=Element14, ComponentLink5Description=https://datasheet.ciiva.com/7746/1738695-7746239.pdf?src-supplier=Element14, ComponentLink5URL=https://datasheet.ciiva.com/7746/1738695-7746239.pdf?src-supplier=Element14, ComponentLink6Description=https://datasheet.ciiva.com/15189/getdatasheetpartid-409289-15189591.pdf?src-supplier=Verical, ComponentLink6URL=https://datasheet.ciiva.com/15189/getdatasheetpartid-409289-15189591.pdf?src-supplier=Verical, Construction=Rectangular, Depth=0.8mm, Designed by="Semih AŞÇI", Features="Moisture Resistant", Height=0.45mm, Lead Free="Lead Free", Lead Pitch=0.3mm, Length=1.6mm, Manufacturer Part Number=RC0603FR-0710KL, Military Standard=Not, Number of Pins=2, Number of Terminations=2, Packaging="Tape and Reel", Power Rating=100mW, Pricing 1="5000=0,00312 (USD)", REACH SVHC=Unknown, RoHS=Yes, RoHS Compliant=Yes, Series=RC, Size Code=0603, Stock 1=18418266, Supplier 1=Digi-Key, Termination=SMD/SMT, Tolerance=1%, Weight=7.1E-05oz, Width=0.8mm
R2 R3 R4: library part "RES 50 OHM 0603", "Res 50 Ohm %2 SMD 0603", Case Code (Metric)=1608, Case Code (Imperial)=0603, Manufacturer=Vishay, Max Operating Temperature=155°C, Max Power Dissipation=3.9W, Min Operating Temperature=-55°C, Power Rating=1.5W, Resistance=50R, Resistor Type="Thick Film", Supplier Part Number 1=541-2655-1-ND, Temperature Coefficient=150ppm/°C, Tolerance=2%, Case/Package=0603, Category="Chip SMD Resistors", ComponentLink1Description=http://uk.rs-online.com/webdocs/1433/0900766b81433c7c.pdf?src-supplier=RSComponents, ComponentLink1URL=http://uk.rs-online.com/webdocs/1433/0900766b81433c7c.pdf?src-supplier=RSComponents, ComponentLink2Description=http://www.alliedelec.com/m/d/8dc8d032a11511c992da52f0414d6bec.pdf?src-supplier=Allied+Electronics, ComponentLink2URL=http://www.alliedelec.com/m/d/8dc8d032a11511c992da52f0414d6bec.pdf?src-supplier=Allied+Electronics, ComponentLink3Description=http://www.vishay.com/docs/31098/rcp.pdf?src-supplier=Digi-Key, ComponentLink3URL=http://www.vishay.com/docs/31098/rcp.pdf?src-supplier=Digi-Key, Depth=0.81mm, Designed by="Semih AŞÇI", Features="Moisture Resistant", Height=0.023inch, Length=0.063inch, Manufacturer Part Number=RCP0603W50R0GEB, Mount="Surface Mount", Number of Terminations=2, Packaging="Tape and Reel", Pricing 1="1=2,08000, 10=1,84800, 100=1,41120 (USD)", RoHS=Yes, Stock 1=6067, Supplier 1=Digi-Key, Termination=Solder, Width=0.032inch
R5 R6 R7 R11 R12 R13: "Res 220 Ohm %1 SMD 0805", Case Code (Metric)=2012, Case Code (Imperial)=0805, Manufacturer=Yageo, Manufacturer Part Number=RC0805FR-07220RL, Max Operating Temperature=155°C, Max Power Dissipation=125mW, Min Operating Temperature=-55°C, Package Quantity=5000, Resistance=220R, Resistance Tolerance=1%, Resistor Type="Thick Film", Supplier Part Number 1=311-220CRCT-ND, Temperature Coefficient=100ppm/°C, Voltage Rating=150V, Case/Package=0805, Category="Chip SMD Resistors", ComponentLink1Description=https://datasheet.ciiva.com/11808/0900766b8106beab-11808180.pdf?src-supplier=RSComponents, ComponentLink1URL=https://datasheet.ciiva.com/11808/0900766b8106beab-11808180.pdf?src-supplier=RSComponents, ComponentLink2Description=https://datasheet.ciiva.com/2457/pyu-r-int-thick-7-2457383.pdf?src-supplier=Digi-Key, ComponentLink2URL=https://datasheet.ciiva.com/2457/pyu-r-int-thick-7-2457383.pdf?src-supplier=Digi-Key, ComponentLink3Description=https://datasheet.ciiva.com/2457/pyu-r-int-thick-7-2457384.pdf?src-supplier=Digi-Key, ComponentLink3URL=https://datasheet.ciiva.com/2457/pyu-r-int-thick-7-2457384.pdf?src-supplier=Digi-Key, ComponentLink4Description=https://datasheet.ciiva.com/2457/pyu-r-int-thick-7-2457385.pdf?src-supplier=Digi-Key, ComponentLink4URL=https://datasheet.ciiva.com/2457/pyu-r-int-thick-7-2457385.pdf?src-supplier=Digi-Key, ComponentLink5Description=https://datasheet.ciiva.com/7941/444164-7941740.pdf?src-supplier=Element14, ComponentLink5URL=https://datasheet.ciiva.com/7941/444164-7941740.pdf?src-supplier=Element14, ComponentLink6Description=https://datasheet.ciiva.com/7941/444164-7941741.pdf?src-supplier=Element14, ComponentLink6URL=https://datasheet.ciiva.com/7941/444164-7941741.pdf?src-supplier=Element14, Construction=Rectangular, Depth=1.25mm, Features="Moisture Resistant", Height=0.5mm, Lead Free="Lead Free", Length=2mm, Military Standard=Not, Number of Terminations=2, Packaging="Tape and Reel", Power Rating=125mW, Pricing 1="1=0,10000, 10=0,04200, 100=0,01690, 1000=0,00759, 2500=0,00659 (USD)", REACH SVHC=Unknown, RoHS=Yes, RoHS Compliant=Yes, Series=RC, Size Code=0805, Stock 1=2756, Supplier 1=Digi-Key, Technology="THICK FILM", Termination=SMD/SMT, Tolerance=1%, Width=0.049inch
R8 R9 R10: library part "RES 1k OHM 0805", "Res 1K Ohm %1 SMD 0805", Case Code (Metric)=2012, Case Code (Imperial)=0805, Manufacturer=Yageo, Max Operating Temperature=155°C, Max Power Dissipation=125mW, Min Operating Temperature=-55°C, Package Quantity=1, Resistance=1k, Resistance Tolerance=1%, Resistor Type="Thick Film", Supplier Part Number 1=311-1.00KCRTR-ND, Temperature Coefficient=100ppm/°C, Voltage Rating=150V, Case/Package=0805, Category="Chip SMD Resistors", Construction=Rectangular, Depth=1.25mm, Designed by="Semih AŞÇI", Features="Moisture Resistant", Height=0.024inch, Lead Free="Lead Free", Length=0.079inch, Manufacturer Part Number=RC0805FR-071KL, Military Standard=Not, Number of Pins=2, Number of Terminations=2, Packaging="Tape and Reel", Power Rating=125mW, Pricing 1="5000=0,00544 (USD)", REACH SVHC=Unknown, RoHS=Yes, RoHS Compliant=Yes, Series=RC, Size Code=0805, Stock 1=5893439, Supplier 1=Digi-Key, Termination=SMD/SMT, Tolerance=1%, Voltage Rating (DC)=150V, Width=0.049inch
U1 U2 U3: library part "BPC-817S (Optocoupler)", "Sensor Photo 4SMD", Case/Package=SMD/SMT, Manufacturer="American Bright", Supplier Part Number 1=2007-BPC-817S(CBIN)CT-ND, Designed by="Semih AŞÇI", Manufacturer Part Number="BPC-817S ( C BIN )", Mount="Surface Mount", Packaging="Tape and Reel", Pricing 1="1=0,39000, 10=0,25700, 100=0,17140, 500=0,11856, 1000=0,09879 (USD)", RoHS=No, Supplier 1=Digi-Key
U4: "MCU 8-bit ATmega AVR RISC 8KB Flash 2.5V/3.3V/5V 32-Pin TQFP", Case/Package=A, Frequency=20MHz, Manufacturer="Microchip / Atmel", Max Operating Temperature=85°C, Max Supply Voltage=5.5V, Min Operating Temperature=-40°C, Min Supply Voltage=1.8V, Package Quantity=250, Supplier Part Number 1=ATMEGA88PA-AU-ND, Voltage=5V, Category=Microcontrollers, ComponentLink1Description=https://datasheet.ciiva.com/29119/155189-da-01-en-microcontr-atmega88pa-au-8bit-tqfp32-29119591.pdf?src-supplier=Conrad, ComponentLink1URL=https://datasheet.ciiva.com/29119/155189-da-01-en-microcontr-atmega88pa-au-8bit-tqfp32-29119591.pdf?src-supplier=Conrad, ComponentLink2Description=https://datasheet.ciiva.com/1158/1691443-1158181.pdf?src-supplier=Element14, ComponentLink2URL=https://datasheet.ciiva.com/1158/1691443-1158181.pdf?src-supplier=Element14, ComponentLink3Description=https://datasheet.ciiva.com/22651/1691443-22651326.pdf?src-supplier=Farnell, ComponentLink3URL=https://datasheet.ciiva.com/22651/1691443-22651326.pdf?src-supplier=Farnell, Contact Plating=Tin,Matte, Core Architecture=AVR, Data Bus Width=8b, Density=8KB, Designed by="Semih AŞÇI", Height=1.05mm, Lead Free="Lead Free", Length=7mm, Manufacturer Part Number=ATMEGA88PA-AU, Max Frequency=20MHz, Memory Size=8KB, Memory Type=FLASH, Mount="Surface Mount", Number of ADC Channels=8, Number of Pins=32, Number of Programmable I/O=23, Number of PWM Channels=6, Number of SPI Channels=1, Number of Timers/Counters=3, Number of I2C Channels=1, Number of I/Os=23, Oscillator Type=Internal, Packaging=Tray, Peripherals="Brown-out Detect/Reset,POR,PWM,WDT", Radiation Hardening=No, RAM Size=1KB, REACH SVHC="No SVHC", RoHS=Yes, Series="AVR® ATmega", Supplier 1=Digi-Key, Termination=SMD/SMT, Watchdog Timer=Yes, Width=7mm, Interface=SPI,UART,I2C,USART,2-Wire
U5 U6: "Operational Amplifier, 1 Func, 6000uV Offset-Max, BIPolar, PDSO8", Case/Package=D, Dual Supply Voltage=9V, Manufacturer="Texas Instruments", Max Dual Supply Voltage=18V, Max Operating Temperature=70°C, Max I/O Voltage=6mV, Min Dual Supply Voltage=3.5V, Min Operating Temperature=0°C, Nominal Supply Current=2.8mA, Operating Supply Current=1.7mA, Output Current per Channel=25mA, Package Quantity=75, Power Dissipation=500mW, Supplier Part Number 1=296-11106-5-ND, Voltage Gain=106.02dB, Input Bias Current=800nA, Bandwidth=1MHz, Category="Amplifiers - Op Amps, Buffer, Instrumentation", Common Mode Rejection Ratio=70dB, ComponentLink1Description=https://datasheet.ciiva.com/15129/getdatasheetpartid-39569-15129678.pdf?src-supplier=Verical, ComponentLink1URL=https://datasheet.ciiva.com/15129/getdatasheetpartid-39569-15129678.pdf?src-supplier=Verical, ComponentLink2Description=https://datasheet.ciiva.com/26344/142522-da-01-en-ic-ua741cd-soic8-tid-26344292.pdf?src-supplier=Conrad, ComponentLink2URL=https://datasheet.ciiva.com/26344/142522-da-01-en-ic-ua741cd-soic8-tid-26344292.pdf?src-supplier=Conrad, ComponentLink3Description=https://datasheet.ciiva.com/1796/ua741-1796673.pdf?src-supplier=Digi-Key, ComponentLink3URL=https://datasheet.ciiva.com/1796/ua741-1796673.pdf?src-supplier=Digi-Key, Designed by="Semih AŞÇI", Gain Bandwidth Product=1MHz, Height=1.58mm, Lead Free="Lead Free", Length=4.9mm, Manufacturer Part Number=UA741CD, Nominal Gain Bandwidth Product=1MHz, Number of Amplifiers=1, Number of Channels=1, Number of Circuits=1, Number of Elements=1, Number of Pins=8, Operating Supply Voltage=18V, Packaging=Rail/Tube, Pricing 1="1=1,10000, 10=0,98200, 25=0,93200, 100=0,76550, 250=0,71560, 500=0,63240, 1000=0,54950 (USD)", Radiation Hardening=No, REACH SVHC="No SVHC", RoHS=Yes, RoHS Compliant=Yes, Slew Rate=0.5V/µs, Stock 1=1600, Supplier 1=Digi-Key, Unity Gain Bandwidth Product=1MHz, Width=3.91mm, Input Offset Voltage (Vos)=6mV
U7: "SIMPLE SWITCHER® 6.5V to 40V, 1A Low Component Count Step-Down Regulator 8-SOIC -40 to 125", Case/Package="SOIC N", Manufacturer="TI National Semiconductor", Max Operating Temperature=125°C, Max Output Current=1A, Max Input Voltage=40V, Min Operating Temperature=-40°C, Min Input Voltage=8V, Output Voltage=12V, Package Quantity=2500, Quiescent Current=2.5mA, Supplier Part Number 1=296-35410-1-ND, Switching Frequency=260kHz, Category="Voltage Regulators - Switching", ComponentLink1Description=https://datasheet.ciiva.com/41457/001013881-da-01-en-ic-reg-buck-lm2675mx-12-nopb-soic-8-tid-41457896.pdf?src-supplier=Conrad, ComponentLink1URL=https://datasheet.ciiva.com/41457/001013881-da-01-en-ic-reg-buck-lm2675mx-12-nopb-soic-8-tid-41457896.pdf?src-supplier=Conrad, ComponentLink2Description=https://datasheet.ciiva.com/3220/lm2675-3220840.pdf?src-supplier=Avnet, ComponentLink2URL=https://datasheet.ciiva.com/3220/lm2675-3220840.pdf?src-supplier=Avnet, Contact Plating=Tin, Designed by="Semih AŞÇI", Efficiency=94%, Lead Free="Lead Free", Manufacturer Part Number=LM2675MX-12/NOPB, Mount="Surface Mount", Number of Outputs=1, Number of Pins=8, Operating Supply Voltage=40V, Output Current=1A, Output Type=Fixed, Packaging="Tape and Reel", Pricing 1="1=4,94000, 10=4,44000, 25=4,19760, 100=3,63790, 250=3,45136, 500=3,09690, 1000=3,08000 (USD)", Radiation Hardening=No, RoHS=Yes, RoHS Compliant=Yes, Series=LM2675, Supplier 1=Digi-Key, Synchronous Rectifier=No
U8: "AP7361 Series 3.3 V 1 A Low SMT Dropout Fixed-Mode Regulator - SOT-223", Case/Package=SOT-223, Dropout Voltage=500mV, Manufacturer=Diodes, Max Operating Temperature=85°C, Max Output Current=1A, Max Power Dissipation=1.1W, Max Input Voltage=6V, Min Current Limit=1.1A, Min Operating Temperature=-40°C, Min Input Voltage=2.2V, Output Voltage=3.3V, Package Quantity=1, Power Dissipation=1.1kW, Power Supply Rejection Ratio (PSRR)=65dB, Quiescent Current=70uA, Reference Voltage=800mV, Supplier Part Number 1=9210603P, Accuracy=1%, Category="Voltage Regulators - Linear", ComponentLink1Description=https://datasheet.ciiva.com/26926/getdatasheetpartid-670786-26926141.pdf?src-supplier=Verical, ComponentLink1URL=https://datasheet.ciiva.com/26926/getdatasheetpartid-670786-26926141.pdf?src-supplier=Verical, ComponentLink2Description=https://datasheet.ciiva.com/25651/ap7361-25651049.pdf?src-supplier=Digi-Key, ComponentLink2URL=https://datasheet.ciiva.com/25651/ap7361-25651049.pdf?src-supplier=Digi-Key, ComponentLink3Description=https://datasheet.ciiva.com/29568/ap7361-29568378.pdf?src-supplier=Digi-Key, ComponentLink3URL=https://datasheet.ciiva.com/29568/ap7361-29568378.pdf?src-supplier=Digi-Key, ComponentLink4Description=https://datasheet.ciiva.com/29568/ap7361-29568379.pdf?src-supplier=Digi-Key, ComponentLink4URL=https://datasheet.ciiva.com/29568/ap7361-29568379.pdf?src-supplier=Digi-Key, Contact Plating=Tin,Matte, Designed by="Semih AŞÇI", Lead Free="Lead Free", Manufacturer Part Number=AP7361-33E-13, Mount="Surface Mount", Number of Outputs=1, Number of Pins=4, Number of Regulators=1, Output Current=1A, Output Type=Fixed, Packaging="Tape and Reel", Polarity=Positive, Pricing 1="30=0,51900, 150=0,32300, 450=0,30600, 900=0,29100, 3000=0,21500 (USD)", Radiation Hardening=No, REACH SVHC="No SVHC", RoHS=Yes, RoHS Compliant=Yes, Series=-, Stock 1=1, Supplier 1=RSComponents, Weight=0.000282oz
X1: library part "CRYSTAL 16 MHZ", "Crystal 16MHz ±30ppm (Tol) ±50ppm (Stability) 20pF FUND 50Ohm 4-Pin Mini-SMD T/R", Case/Package=SMD/SMT, ESR (Equivalent Series Resistance)=50R, Frequency=16MHz, Frequency Stability=50ppm, Frequency Tolerance=30ppm, Load Capacitance=20pF, Manufacturer="ECS International", Max Operating Temperature=70°C, Min Operating Temperature=-20°C, Package Quantity=1, Supplier Part Number 1=XC1120CT-ND, Category=Crystals, ComponentLink1Description=https://datasheet.ciiva.com/853/ecx-53b-853408.pdf?src-supplier=Digi-Key, ComponentLink1URL=https://datasheet.ciiva.com/853/ecx-53b-853408.pdf?src-supplier=Digi-Key, ComponentLink2Description=https://datasheet.ciiva.com/853/ecx-53b-853407.pdf?src-supplier=Digi-Key, ComponentLink2URL=https://datasheet.ciiva.com/853/ecx-53b-853407.pdf?src-supplier=Digi-Key, ComponentLink3Description=https://datasheet.ciiva.com/853/ecx-53b-853406.pdf?src-supplier=Digi-Key, ComponentLink3URL=https://datasheet.ciiva.com/853/ecx-53b-853406.pdf?src-supplier=Digi-Key, Designed by="Semih AŞÇI", Height=0.033inch, Lead Free="Lead Free", Length=0.197inch, Manufacturer Part Number=ECS-160-20-30B-TR, Mount="Surface Mount", Packaging="Tape and Reel", Pricing 1="1=1,33000, 10=1,26800, 50=1,23900, 100=1,06200, 500=1,03250 (USD)", RoHS=Yes, RoHS Compliant=Yes, Series=ECX-53B, Stock 1=18126, Supplier 1=Digi-Key, Termination=SMD/SMT, Tolerance=50ppm, Width=0.126inch

## Free pads (board coordinates)
  round 125.98 hole 125.98 mask+1.97: 12(3005,4800) 13(3005,1600) 14(6860,1600) 15(6860,4800)

## Via types
v1: diameter 23.62, hole 13.78, Top Layer to Int1 (GND), 70 vias
v2: diameter 23.62, hole 13.78, Top Layer to Bottom Layer, 12 vias
v3: diameter 23.62, hole 13.78, Top Layer to Int2 (PWR), 7 vias

## Nets (pads, with @x,y where several pads share a name; then routed paths per layer and width w, separated by ;. In a path a pad name is that pad's centre, name@x,y a point inside that pad or via, vN(x,y) a via of type N, cw(c..) or ccw(c..) an arc to the next point about the centre after c; other vN are vias at no path point)
3V3DC: C17.2 C18.2 LCD.1 U8.3
12VDC: C8.2 C9.2 J3.1 U7.7
+5VDC: C1.2 C2.2 C3.2 C4.2 C5.2 C11.1 C15.2 C16.2 L1.2 R1.1 U4.4 U4.6 U4.18 U4.20 U7.4 U8.1 | length 893
  Top Layer w15: C5.2 3950.78,2875 3963.02,2862.76 U4.6 ; C3.2@3936.59,2931.91 3930.32,2938.19 C3.2 4074.93,2950 4099.18,2925.75 U4.4 ; R1.1 v3(4290,3345) ; U4.18 4510.82,2831.26 4552.08,2790 C4.2 ; U4.20 4589.97,2894.25 4619.22,2865 C2.2
  other v3: 4640,2910 3985,2915 3990,2990 6545,3635 6587.5,3635 6630,3635
GND: C1.1 C2.1 C3.1 C4.1 C5.1 C6.1 C7.1 C8.1 C9.1 C11.2 C12.1 C13.1 C14.1 C15.1 C16.1 C17.1 C18.1 D4.1 J1.1- J2.2 J3.2 J3.3 LCD.2 Q1.3 R14.2 R15.2 U1.2 U2.2 U3.2 U4.3 U4.5 U4.21 U5.4 U6.4 U7.6 U8.2 X1.2 X1.4
  other v1: 4232.46,1652.73 5440.24,1673.99 6191.7,1715.45 6691.82,1759.5 3495.83,1767.09 4578.18,1822.93 3139.48,1849.53 5227.75,1990.12 3139.47,2112.8 3982.49,2208.54 6712.55,2277.76 4402.66,2357.46 5310.67,2456.55 3716.56,2493.09 4046.31,2623.4 4243.1,2623.39 3096.92,2673.92 4748.38,2676.58 3759.1,2745.72 5756.37,2840.06 5365.22,2842 5169.2,2853.32 6678.86,2928.16 4568.95,2934.34 6230.58,2995.54 3626.13,2998.36 4780.65,3040.63 5253.65,3118.03 4564.88,3152.6 4891.98,3160.58 5974.04,3176.93 3400.09,3216.43 4221.83,3224.41 3846.86,3240.37 4530.31,3251 4748.38,3352.06 3825.58,3405.24 3102.24,3442.47 6746.24,3467.15 4341.5,3503.64 5216.42,3519.59 6098.42,3526.75 4793.59,3559.49 5720.09,3617.44 4139.39,3644.59 3382.05,3720.39 4990.38,3721.71 6798.06,3723.68 4439.89,3745.64 4017.06,3764.26 5315.85,3819.56 4086.2,3961.05 5670.86,4070.92 6634.81,4070.91 6766.97,4089.06 6256.48,4102.01 4885.7,4270.44 6673.68,4368.91 4185.5,4373.53 5904.07,4454.42 3949.3,4480.9 4704.31,4488.11 3639.73,4504.16 5492.06,4508.84 3099.33,4509.53 4371.6,4513.11 3306.9,4525.63 5004.9,4537.35 6689.23,4822.39 6051.77,4840.52
NetC6_2: C6.2 U4.7 X1.3 | length 201.6
  Top Layer w15: C6.2 4019.5,2831.26 U4.7
NetC7_2: C7.2 U4.8 X1.1 | length 432.7
  Top Layer w15: C7.2 3961.6,2516.64 4051.64,2516.64 4115,2580 4115,2761.23 4135.71,2781.94 U4.8
NetC10_1: C10.1 U7.1
NetC10_2: C10.2 D4.2 L1.1 U7.8
NetC12_2: C12.2 R20.2 U4.25 U5.6 | length 694.1
  Top Layer w15: U4.25 4415.24,3115.82 4415,3116.05 C12.2 4765.28,3200.47 4896.78,3331.97 U5.6
NetC13_2: C13.2 J1.1+ J1.2- Q2.3 R2.2 R5.2 R8.2 R19.1 U4.23 | length 8301.7
  Top Layer w15: R5.2@3987.9,4055.5 R5.2 3996.81,4052.6 4063.27,4119.06 Q2.3 4250.24,4384.76 4250,4385 ; U4.23 4568.74,2988.74 v2(4595,3015) C13.2 ; 4644.4,2983.51 4688.39,2983.51 4785.14,2886.76 5004.48,2886.76 5052.15,2839.09 5052.15,2635.65 4272.77,1856.27 4197.87,1856.27 4165.83,1888.31 3569.85,1888.31 3561.06,1879.52 3561.06,1796.61 3636.77,1720.9 5058.97,1720.9 J1.1+ ; R19.1 5303.34,3030 5303.58,3029.76 v2(5390.91,3029.76)